# Altium PCB SmartToy_MainBoard_REV02 PCB.PcbDoc (part 3 of 3)
Units mm, origin at the board's own origin, x right, y up, seen from the top; angles counter-clockwise.
Board outline 55 x 50 mm, 2 copper layers (Top Layer, Bottom Layer), stack 0.98 mm thick; 120 components, 113 nets, 389 pads, 211 vias.
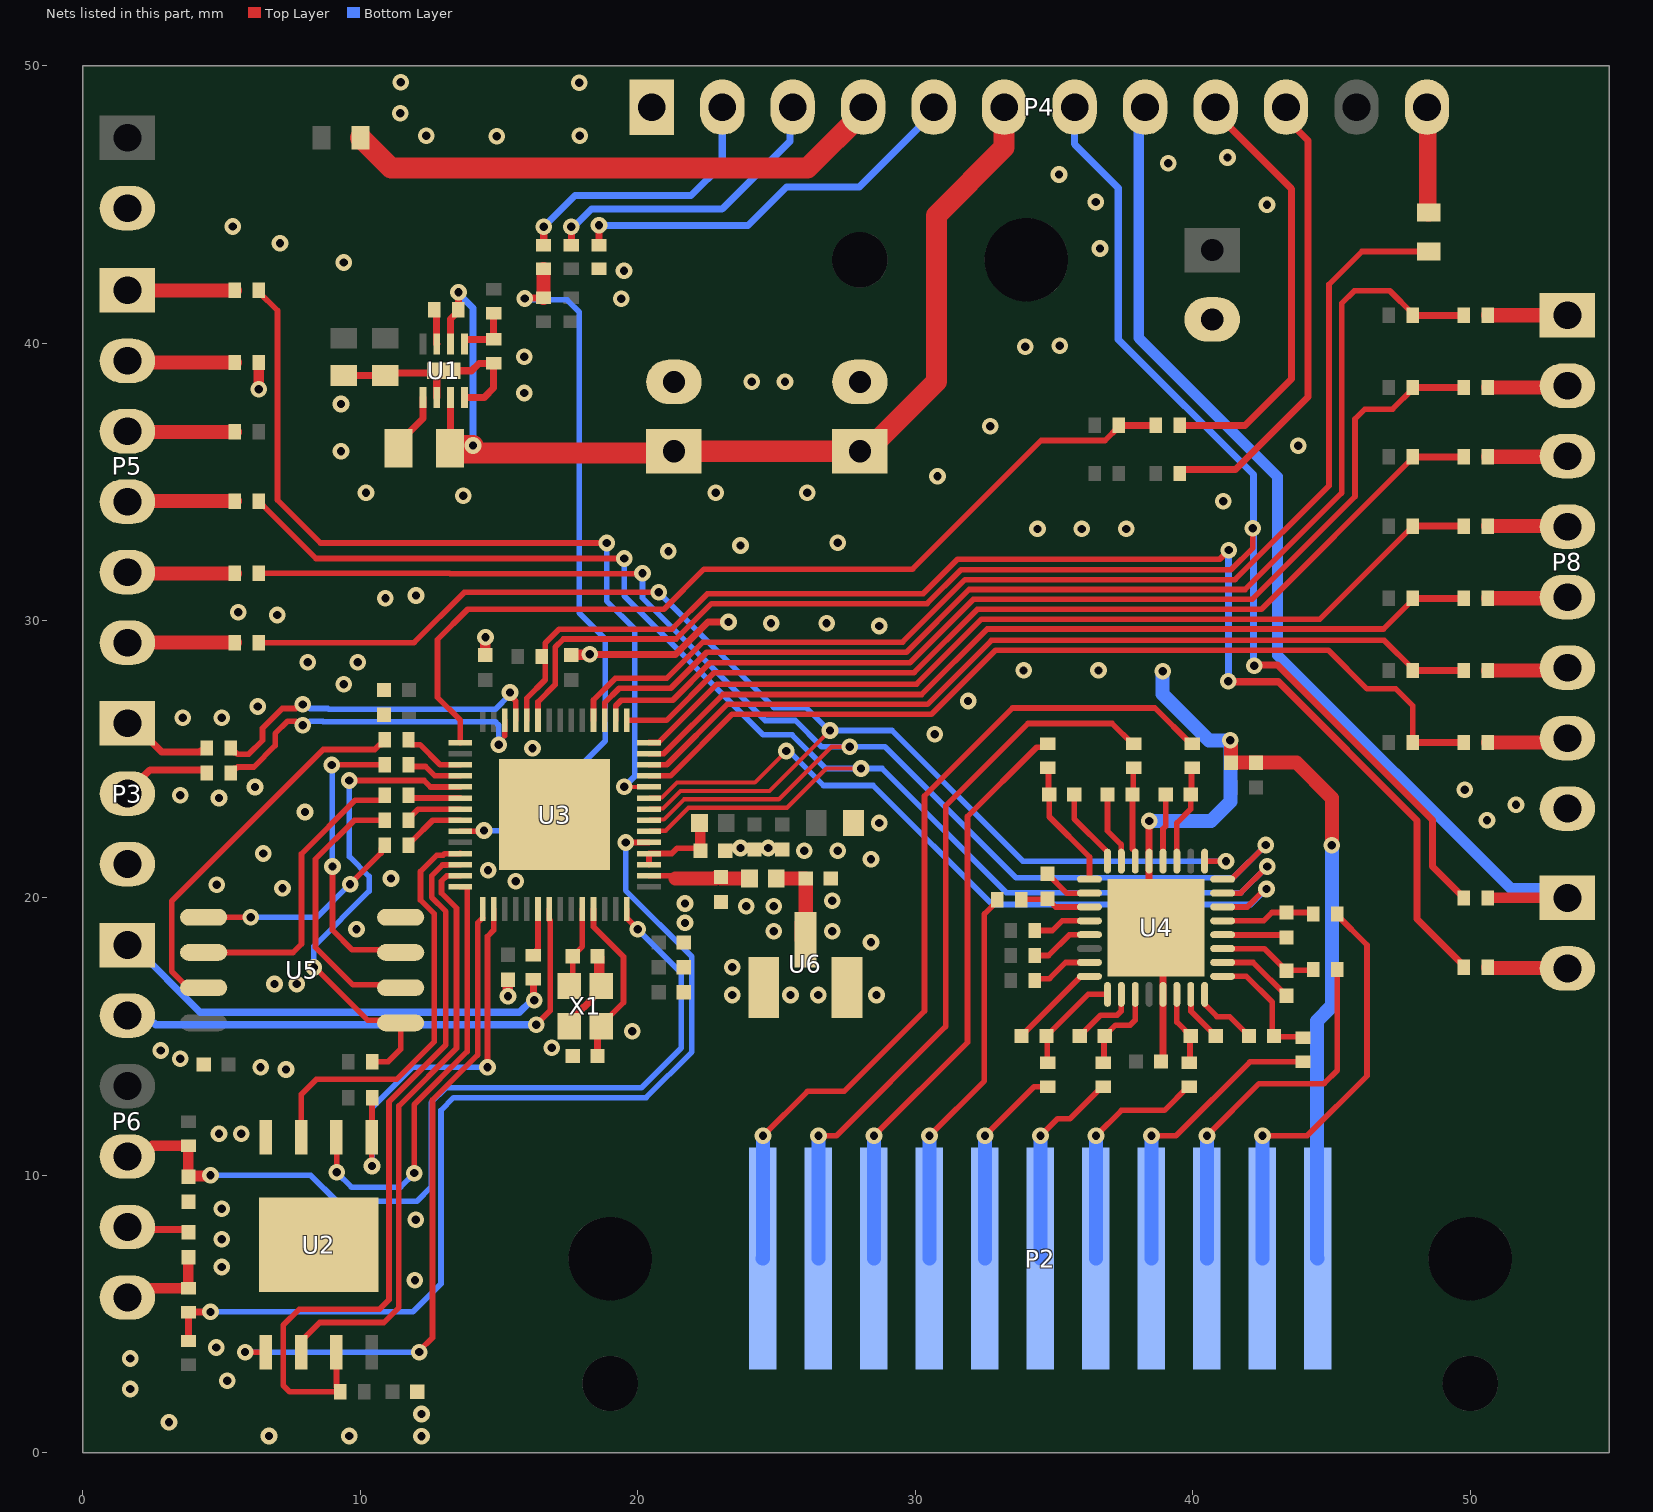
[diagram p2: the nets of this part, all layers, seen from the top]

## Via types
v1: diameter 0.6, hole 0.3, Top Layer to Bottom Layer, tented both sides, 211 vias

## Nets (pads, with @x,y where several pads share a name; then routed paths per layer and width w, separated by ;. In a path a pad name is that pad's centre, name@x,y a point inside that pad or via, vN(x,y) a via of type N, cw(c..) or ccw(c..) an arc to the next point about the centre after c; other vN are vias at no path point) (continued)
D_N: R16.1 U3.25 | length 12.6
  Top Layer w0.203: R16.1@5.332,25.4 5.332,25.35 5.455,25.227 5.526,25.227 5.574,25.179 5.97,25.179 6.469,25.678 6.469,26.115 7.181,26.827 7.67,26.827 7.817,26.975 v1(7.925,26.975) ; v1(15.392,27.407) 15.392,27.299 15.598,27.093 15.598,26.723 15.6,26.722 U3.25@15.6,26.4
  Bottom Layer w0.203: v1(7.925,26.975) 8.032,26.975 8.18,26.827 8.827,26.827 8.851,26.803 14.867,26.803 15.392,27.328 v1(15.392,27.407)
D_P: R17.1 U3.26 | length 12.1
  Top Layer w0.203: R17.1@5.332,24.5 5.332,24.55 5.455,24.673 5.526,24.673 5.574,24.721 6.159,24.721 6.927,25.489 6.927,25.926 7.371,26.37 7.67,26.37 7.817,26.222 v1(7.925,26.222) ; 15.198,25.847 15.198,26.398 U3.26@15.2,26.4
  Bottom Layer w0.203: v1(7.925,26.222) 8.032,26.222 8.18,26.37 8.637,26.37 8.662,26.345 14.867,26.345 14.986,26.226 v1(14.986,25.527)
ESP_EN: C21.2 P6.4 R25.1 U3.56 | length 31.6
  Top Layer w0.203: U3.56@19.6,19.6 19.6,19.278 19.99,18.888 v1(19.99,18.872)
  Top Layer w0.381: P6.4@1.6,10.68 2.13,10.68 2.518,11.068 R25.1@3.8,11.068 C21.2@3.8,9.95 3.829,9.979 4.569,9.979 v1(4.597,10.008)
  Bottom Layer w0.203: v1(4.597,10.008) 8.204,10.008 9.144,9.068 12.04,9.068 12.548,9.576 12.548,12.624 13.081,13.157 20.128,13.157 21.565,14.594 21.565,17.297 v1(19.99,18.872)
ESP_IO0: R26.1 R30.1 U3.5 | length 36.1
  Top Layer w0.203: v1(19.558,21.996) 19.56,21.998 20.398,21.998 U3.5@20.4,22
  Top Layer w0.254: R26.1@3.8,4.032 R30.1@3.8,5.068 3.831,5.1 3.857,5.074 4.592,5.074 v1(4.597,5.08)
  Bottom Layer w0.203: v1(4.597,5.08) 11.887,5.08 12.903,6.096 12.903,12.344 13.36,12.802 20.294,12.802 21.946,14.453 21.946,17.882 19.558,20.269 v1(19.558,21.996)
ESP_IO0_FL: C22.2 P6.6 R30.2 | length 3.5
  Top Layer w0.381: P6.6@1.6,5.6 2.13,5.6 2.462,5.932 R30.2@3.8,5.932 C22.2@3.8,7.05
ESP_RXD0: P6.2 U3.49 | length 19.3
  Top Layer w0.203: v1(16.332,15.43) 16.84,15.938 16.84,19.176 16.802,19.215 16.802,19.598 U3.49@16.8,19.6
  Bottom Layer w0.254: P6.2@1.6,15.76 1.858,15.502 2.55,15.502 2.622,15.43 v1(16.332,15.43)
ESP_TXD0: P6.1 R55.2 | length 16.5
  Top Layer w0.254: R55.2@16.231,17.069 16.245,17.054 16.245,16.322 v1(16.26,16.307)
  Bottom Layer w0.254: P6.1@1.6,18.3 1.8,18.3 4.22,15.88 15.738,15.88 16.129,16.27 v1@16.129,16.307
FL_HOLD: R4.1 U2.7 U3.40 | length 27.5
  Top Layer w0.203: U2.7@9.135,3.63 9.135,2.383 9.268,2.25 R4.1@9.268,2.2 7.452,2.2 7.214,2.438 7.214,4.597 7.798,5.182 10.693,5.182 11.028,5.517 11.028,12.654 13.081,14.707 13.081,19.51 12.565,20.026 12.565,20.795 12.959,21.188 13.128,21.188 13.138,21.198 13.598,21.198 U3.40@13.6,21.2
FL_WP: U2.3 U3.39 | length 15.2
  Top Layer w0.203: U2.3@7.865,11.37 7.865,12.92 8.407,13.462 11.303,13.462 12.654,14.813 12.654,19.434 12.167,19.922 12.167,20.955 12.756,21.544 12.98,21.544 13.035,21.598 13.598,21.598 U3.39@13.6,21.6
FUSE_OUT: F1.2 P4.4 | length 19.6
  Top Layer w0.762: F1.2@10,47.4 10.012,47.4 10.112,47.3 11.108,46.304 26.111,46.304 28.12,48.313 P4.4@28.12,48.5
GND: C1.2 C2.2 C3.1 C4.1 C5.1 C6.1 C8.1 C13.2 C14.2 C15.2 C21.1 C22.1 C23.2 C24.1 C25.1 C26.1 C27.1 C28.1 C29.1 C30.1 C31.1 C32.1 C33.1 C34.1 C35.1 C36.1 C37.1 C38.1 FB1.1 P1.2 P2.1 P3.3 P4.1 P6.5 P8.8 R5.1 R31.1 U1.2 U1.4 U1.9 U2.4 U2.9 U3.57 U4.5 U4.21 U4.33 U5.4 U6.2 X1.2 X1.4 | length 62
  Top Layer w0.254: P6.5@1.6,8.14 1.695,8.045 3.705,8.045 C22.1@3.8,7.95 ; C3.1@9.4,38.825 C4.1@10.9,38.825 10.987,38.913 12.708,38.913 12.75,38.871 U1.2@12.75,38.035 ; U1.9@13,39 14.004,39 14.272,39.268 R5.1@14.8,39.268 14.8,38.374 14.461,38.035 U1.4@13.75,38.035 ; X1.2@17.525,15.375 17.823,15.673 17.823,15.846 18.048,16.071 18.066,16.071 18.229,16.234 18.229,16.252 18.377,16.4 18.377,16.527 X1.4@18.675,16.825 ; v1(18.263,28.778) 21.361,28.778 22.53,29.947 v1(23.266,29.947) ; v1(38.425,22.773) U4.21@38.425,21.325 38.425,19.175 U4.33@38.675,18.925 38.925,18.675 U4.5@38.925,16.525 38.923,16.523 38.923,14.173 C15.2@38.85,14.1
  Top Layer w0.381: v1(6.332,38.332) FB1.1@6.332,39.3 ; C33.1@14.5,28.75 14.504,28.754 14.504,29.388 v1(14.507,29.392) ; v1(15.316,16.459) C35.1@15.316,17.051 ; C8.1@17.6,28.75 17.614,28.764 18.248,28.764 v1(18.263,28.778) ; C28.1@18.55,17.9 18.613,17.837 18.613,16.887 X1.4@18.675,16.825
  Top Layer w0.508: v1@41.338,25.693 v1(41.351,25.68) 41.374,25.657 41.374,24.876 C13.2@41.375,24.875 C14.2@42.275,24.875 43.73,24.875 45.009,23.597 v1(45.009,21.895)
  Bottom Layer w0.508: v1(38.425,22.773) 40.655,22.773 41.351,23.47 v1(41.351,25.68) 40.589,25.68 38.913,27.356 v1(38.913,28.169) ; P2.1@44.5,7 44.475,7.025 44.475,15.569 45.009,16.103 v1(45.009,21.895)
  other v1: 6.706,0.61 9.601,0.61 12.2,0.6 3.1,1.1 12.2,1.4 1.7,2.3 5.2,2.6 1.7,3.4 4.8,3.8 11.963,6.223 5,6.7 5,7.7 11.989,8.407 5,8.8 4.9,11.5 5.7,11.5 7.315,13.818 6.401,13.894 3.5,14.2 2.8,14.5 16.9,14.6 19.8,15.2 23.4,16.5 25.5,16.5 26.5,16.5 28.6,16.5 6.9,16.9 7.7,16.9 23.4,17.5 28.4,18.4 24.9,18.8 27,18.8 9.855,18.872 21.7,19.1 23.9,19.7 24.9,19.7 21.7,19.8 27,19.9 7.188,20.345 4.826,20.472 15.6,20.6 11.1,20.7 14.6,21 28.4,21.4 6.5,21.6 26,21.7 27.2,21.7 23.7,21.8 24.7,21.8 28.7,22.7 50.6,22.8 8,23.1 51.649,23.356 4.9,23.6 3.5,23.7 49.8,23.9 6.2,24 16.2,25.4 30.7,25.9 3.6,26.5 5,26.5 6.3,26.9 31.9,27.1 9.4,27.7 33.9,28.2 36.6,28.2 8.1,28.5 9.9,28.5 28.7,29.8 24.8,29.9 26.8,29.9 7,30.2 5.6,30.3 10.9,30.8 12,30.9 21.1,32.5 23.7,32.7 27.2,32.8 34.4,33.3 36,33.3 37.6,33.3 41.1,34.3 13.7,34.5 10.2,34.6 22.8,34.6 26.1,34.6 30.8,35.2 9.3,36.1 43.8,36.3 32.7,37 9.3,37.8 15.9,38.2 24.1,38.6 25.3,38.6 15.9,39.5 33.961,39.871 35.2,39.9 19.4,41.6 19.5,42.6 9.4,42.9 36.652,43.409 7.1,43.6 5.4,44.2 42.672,44.983 36.5,45.085 35.179,46.076 39.116,46.482 41.25,46.685 14.91,47.447 12.37,47.473 17.907,47.473 11.43,48.285 17.882,49.378 11.455,49.403
LANGUE_SEL: R35.1 R45.1 U3.29 | length 33.2
  Top Layer w0.203: U3.29@13.6,25.6 13.6,26.405 12.776,27.229 12.776,29.312 13.868,30.404 20.94,30.404 22.387,31.852 29.896,31.852 34.532,36.488 36.836,36.488 37.332,36.983 R45.1@37.332,37.033
  Top Layer w0.254: R45.1@37.332,37.033 R35.1@38.668,37.033
LED_K: R46.1 U3.18 | length 41.8
  Top Layer w0.203: U3.18@18.4,26.4 18.4,27.132 19.182,27.915 21.037,27.915 22.34,29.218 29.539,29.218 31.792,31.471 41.52,31.471 44.907,34.858 44.907,42.113 46.094,43.3 R46.1@48.5,43.3
LNA_IN: C26.2 L2.2 U3.2 | length 3.7
  Top Layer w0.203: U3.2@20.4,20.8 21.262,20.8 21.361,20.701
  Top Layer w0.508: 21.361,20.701 22.8,20.701 22.848,20.749 C26.2@23,20.749 ; C26.2@23,20.701 24.019,20.701 L2.2@24.02,20.7
MCU_DAC1: P4.7 R29.2 U3.23 | length 65.1
  Top Layer w0.203: U3.23@16.4,26.4 16.4,27.068 17.018,27.686 17.018,29.037 17.313,29.332 21.377,29.332 22.651,30.607 30.425,30.607 31.645,31.826 41.373,31.826 42.164,32.618 v1(42.164,33.325)
  Top Layer w0.254: v1(42.215,28.372) 42.24,28.397 43.053,28.397 48.641,22.809 48.641,21.127 R29.2@49.768,20
  Bottom Layer w0.203: v1(42.164,33.325) v1@42.189,33.299 ; v1@42.189,28.397 v1(42.215,28.372)
  Bottom Layer w0.254: P4.7@35.74,48.5 35.74,47.166 37.313,45.593 37.313,40.132 42.189,35.255 42.189,33.35 v1(42.164,33.325) ; v1@42.189,28.397 v1@42.189,33.299
MCU_DAC2: R33.2 R61.1 U3.24 | length 48.7
  Top Layer w0.203: U3.24@16,26.4 16,27.201 16.662,27.864 16.662,28.7 16.662,29.185 17.166,29.688 21.229,29.688 22.504,30.963 30.278,30.963 31.523,32.207 40.97,32.207 v1(41.3,32.537)
  Top Layer w0.254: v1(41.275,27.813) 41.296,27.792 43.083,27.792 48.082,22.793 48.082,19.236 49.768,17.55 R33.2@49.768,17.5
  Bottom Layer w0.203: v1@41.275,32.512 v1(41.3,32.537)
  Bottom Layer w0.254: v1(41.275,27.813) 41.288,27.826 41.288,32.499 v1@41.275,32.512
MCU_SL_PAGE2: R37.1 R47.1 U3.17 | length 42.1
  Top Layer w0.203: U3.17@18.8,26.4 18.8,27.03 19.329,27.559 21.184,27.559 22.482,28.857 29.682,28.857 31.939,31.115 41.885,31.115 45.364,34.595 45.364,41.427 45.822,41.885 47.097,41.885 47.932,41.05 R37.1@47.932,41
  Top Layer w0.254: R37.1@47.932,41 R47.1@49.768,41
MCU_SL_PAGE3: R38.1 R48.1 U3.16 | length 37.5
  Top Layer w0.203: U3.16@19.2,26.4 19.202,26.402 19.202,26.928 19.4,27.127 21.255,27.127 22.604,28.476 29.804,28.476 32.087,30.759 42.139,30.759 45.846,34.467 45.846,37.261 46.203,37.617 47.199,37.617 47.932,38.35 R38.1@47.932,38.4
  Top Layer w0.254: R38.1@47.932,38.4 R48.1@49.768,38.4
MCU_SL_PAGE4: R39.1 R49.1 U3.15 | length 34.1
  Top Layer w0.203: U3.15@19.6,26.4 21.031,26.4 22.751,28.121 29.951,28.121 32.234,30.404 42.469,30.404 47.792,35.727 47.808,35.727 47.932,35.85 R39.1@47.932,35.9
  Top Layer w0.254: R39.1@47.932,35.9 R49.1@49.768,35.9
MCU_SL_PAGE5: R40.1 R50.1 U3.14 | length 32.6
  Top Layer w0.203: U3.14@20.4,25.6 20.749,25.6 22.854,27.706 30.045,27.706 32.387,30.048 44.58,30.048 R40.1@47.932,33.4
  Top Layer w0.254: R40.1@47.932,33.4 R50.1@49.768,33.4
MCU_SL_PAGE6: R41.1 R51.1 U3.13 | length 31.7
  Top Layer w0.203: U3.13@20.4,25.2 20.933,25.2 23.063,27.33 30.227,27.33 32.589,29.693 46.874,29.693 47.932,30.75 R41.1@47.932,30.8
  Top Layer w0.254: R41.1@47.932,30.8 R51.1@49.768,30.8
MCU_SL_PAGE7: R42.1 R52.1 U3.12 | length 31.7
  Top Layer w0.203: U3.12@20.4,24.8 21.041,24.8 23.216,26.975 30.434,26.975 32.741,29.281 46.9,29.281 47.932,28.25 R42.1@47.932,28.2
  Top Layer w0.254: R42.1@47.932,28.2 R52.1@49.768,28.2
MCU_SL_PAGE8: R43.1 R53.1 U3.11 | length 33.4
  Top Layer w0.203: U3.11@20.4,24.4 21.174,24.4 23.393,26.619 30.582,26.619 32.888,28.926 44.891,28.926 46.281,27.536 47.318,27.536 47.932,26.922 R43.1@47.932,25.6
  Top Layer w0.254: R43.1@47.932,25.6 R53.1@49.768,25.6
MUSIC_MODE: R21.1 R24.1 U3.37 | length 26.3
  Top Layer w0.203: U3.37@13.6,22.4 13.602,22.402 14.426,22.402 v1(14.453,22.428)
  Top Layer w0.254: v1(15.926,41.605) 15.939,41.618 16.587,41.618 R21.1@16.6,41.632
  Top Layer w0.508: R21.1@16.6,41.632 R24.1@16.6,42.668
  Bottom Layer w0.203: v1(14.453,22.428) 15.596,22.428 18.821,25.654 18.821,29.337 17.884,30.274 17.884,41.12 17.45,41.554 15.977,41.554 v1(15.926,41.605)
NetC7_1: C7.1 R8.2 U4.1 | length 3.8
  Top Layer w0.203: R8.2@34.775,14.057 34.75,14.082 34.75,15 C7.1@34.725,15.025 36.225,16.525 U4.1@36.925,16.525
NetC7_2: C7.2 U4.32 | length 3.3
  Top Layer w0.203: C7.2@33.825,15.025 33.978,15.178 33.978,15.182 35.941,17.145 35.941,17.153 35.963,17.175 U4.32@36.275,17.175
NetC9_1: C9.1 R9.2 U4.3 | length 3.3
  Top Layer w0.203: R9.2@36.775,14.057 36.8,14.082 36.8,15 C9.1@36.825,15.025 37.218,15.418 37.744,15.418 37.925,15.598 U4.3@37.925,16.525
NetC9_2: C9.2 U4.2 | length 2.5
  Top Layer w0.203: C9.2@35.925,15.025 36.673,15.773 37.272,15.773 37.416,15.918 37.416,16.516 U4.2@37.425,16.525
NetC10_1: C10.1 R10.2 U4.6 | length 2.7
  Top Layer w0.203: U4.6@39.425,16.525 39.425,15.525 C10.1@39.925,15.025 39.9,15 39.9,14.082 R10.2@39.875,14.057
NetC10_2: C10.2 U4.7 | length 1.9
  Top Layer w0.203: U4.7@39.925,16.525 39.934,16.516 39.934,15.916 C10.2@40.825,15.025
NetC11_1: C11.1 R11.2 U4.9 | length 4.5
  Top Layer w0.203: U4.9@41.075,17.175 41.931,17.175 42.866,16.24 42.866,15.084 C11.1@42.925,15.025 42.959,14.991 43.941,14.991 R11.2@43.975,14.957
NetC11_2: C11.2 U4.8 | length 2.4
  Top Layer w0.203: U4.8@40.425,16.525 40.434,16.516 40.434,16.157 40.869,15.723 41.327,15.723 C11.2@42.025,15.025
NetC12_1: C12.1 R12.2 U4.11 | length 3.6
  Top Layer w0.203: U4.11@41.075,18.175 42.575,18.175 C12.1@43.375,17.375 43.4,17.4 44.318,17.4 R12.2@44.343,17.425
NetC12_2: C12.2 U4.10 | length 2.8
  Top Layer w0.203: U4.10@41.075,17.675 42.175,17.675 C12.2@43.375,16.475
NetC16_1: C16.1 R13.2 U4.13 | length 3.4
  Top Layer w0.203: U4.13@41.075,19.175 42.553,19.175 42.853,19.475 C16.1@43.375,19.475 44.293,19.475 R13.2@44.343,19.425
NetC16_2: C16.2 U4.12 | length 2.3
  Top Layer w0.203: U4.12@41.075,18.675 41.084,18.666 43.284,18.666 C16.2@43.375,18.575
NetC17_1: C17.1 R14.2 U4.19 | length 3.6
  Top Layer w0.203: U4.19@39.425,21.325 39.425,22.702 39.925,23.202 C17.1@39.925,23.725 39.95,23.75 39.95,24.668 R14.2@39.975,24.693
NetC17_2: C17.2 U4.20 | length 2.4
  Top Layer w0.203: U4.20@38.925,21.325 38.925,22.49 39.025,22.59 C17.2@39.025,23.725
NetC18_1: C18.1 R15.2 U4.22 | length 3.4
  Top Layer w0.203: R15.2@37.875,24.693 37.85,24.668 37.85,23.75 C18.1@37.825,23.725 37.825,21.763 37.925,21.663 U4.22@37.925,21.325
NetC18_2: C18.2 U4.23 | length 2.6
  Top Layer w0.203: C18.2@36.925,23.725 36.925,22.419 37.416,21.928 37.416,21.334 U4.23@37.425,21.325
NetC19_1: C19.1 R18.2 U4.25 | length 4.6
  Top Layer w0.203: R18.2@34.775,24.693 34.8,24.668 34.8,23.75 C19.1@34.825,23.725 34.825,22.925 36.275,21.475 U4.25@36.275,20.675
NetC19_2: C19.2 U4.24 | length 2.9
  Top Layer w0.203: C19.2@35.725,23.725 35.725,22.85 36.925,21.65 U4.24@36.925,21.325
NetC20_1: C20.1 R19.2 U4.27 | length 2.6
  Top Layer w0.203: R19.2@33.817,19.939 33.834,19.955 34.741,19.955 C20.1@34.757,19.971 35.053,19.675 U4.27@36.275,19.675
NetC20_2: C20.2 U4.26 | length 1.8
  Top Layer w0.203: C20.2@34.757,20.871 35.453,20.175 U4.26@36.275,20.175
NetC25_2: C25.2 L2.1 U6.1 | length 3.3
  Top Layer w0.508: L2.1@24.98,20.7 C25.2@26.05,20.7 26.05,19.25 25.9,19.1 U6.1@25.9,18.5
NetFB1_2: FB1.2 P5.2 | length 3.9
  Top Layer w0.508: P5.2@1.6,39.3 FB1.2@5.468,39.3
NetFB2_2: FB2.2 P5.3 | length 3.9
  Top Layer w0.508: P5.3@1.6,36.8 FB2.2@5.468,36.8
NetL1_2: L1.2 U1.1 | length 2.2
  Top Layer w0.254: L1.2@11.37,36.2 11.37,36.395 12.25,37.275 U1.1@12.25,38.035
NetP4_2: P4.2 R24.2 | length 10.1
  Top Layer w0.254: R24.2@16.6,43.532 16.612,43.543 16.606,43.549 16.606,44.19 v1(16.612,44.196)
  Bottom Layer w0.254: v1(16.612,44.196) 17.729,45.314 21.92,45.314 23.04,46.433 P4.2@23.04,48.5
NetP4_3: P4.3 R27.2 | length 11.1
  Top Layer w0.254: R27.2@17.6,43.532 v1(17.6,44.194)
  Bottom Layer w0.254: v1(17.6,44.194) 17.692,44.194 18.329,44.831 23.038,44.831 25.475,47.268 25.475,48.395 P4.3@25.58,48.5
NetP4_5: P4.5 R31.2 | length 14.6
  Top Layer w0.254: R31.2@18.6,43.532 v1(18.6,44.24)
  Bottom Layer w0.254: v1(18.6,44.24) 23.97,44.24 25.349,45.618 27.978,45.618 30.66,48.3 P4.5@30.66,48.5
NetP4_9: P4.9 R35.2 | length 15.6
  Top Layer w0.254: R35.2@39.532,37.033 41.885,37.033 43.561,38.71 43.561,45.559 40.82,48.3 P4.9@40.82,48.5
NetP4_10: P4.10 R36.2 | length 16.6
  Top Layer w0.254: R36.2@39.532,35.3 39.532,35.35 39.63,35.448 41.544,35.448 44.145,38.049 44.145,47.3 43.36,48.086 P4.10@43.36,48.5
NetP4_12: P4.12 R46.2 | length 3.8
  Top Layer w0.635: P4.12@48.44,48.5 48.47,48.47 48.47,44.708 48.478,44.7 R46.2@48.5,44.7
NetP5_1: P5.1 R23.2 | length 3.9
  Top Layer w0.508: P5.1@1.6,41.9 R23.2@5.468,41.9
NetP5_4: P5.4 R28.2 | length 3.9
  Top Layer w0.508: P5.4@1.6,34.3 R28.2@5.468,34.3
NetP5_5: P5.5 R32.2 | length 3.9
  Top Layer w0.508: P5.5@1.6,31.7 R32.2@5.468,31.7
NetP5_6: P5.6 R34.2 | length 3.9
  Top Layer w0.508: P5.6@1.6,29.2 R34.2@5.468,29.2
NetR2_2: R2.2 U1.7 | length 1.3
  Top Layer w0.254: R2.2@12.668,41.2 12.748,41.12 12.748,39.967 U1.7@12.75,39.965
NetR3_1: R3.1 R5.2 U1.5 | length 2.2
  Top Layer w0.254: U1.5@13.75,39.965 13.75,40.13 13.752,40.132 R5.2@14.8,40.132 R3.1@14.8,41.068
NetR6_2: R6.2 U4.28 | length 2.1
  Top Layer w0.203: R6.2@34.307,18.825 34.939,18.825 35.289,19.175 U4.28@36.275,19.175
NetR7_2: R7.2 U4.29 | length 2.3
  Top Layer w0.203: R7.2@34.307,17.925 34.801,17.925 35.551,18.675 U4.29@36.275,18.675
NetR20_1: R20.1 U4.31 | length 2.2
  Top Layer w0.203: R20.1@34.307,17.025 34.376,17.094 34.837,17.094 35.418,17.675 U4.31@36.275,17.675
NetR55_1: R55.1 U3.48 | length 1.8
  Top Layer w0.203: R55.1@16.1,17.932 16.15,17.932 16.4,18.182 U3.48@16.4,19.6
NetR56_1: R56.1 U3.36 | length 2.3
  Top Layer w0.203: R56.1@11.732,21.9 11.732,21.95 11.855,22.073 11.88,22.073 12.607,22.8 U3.36@13.6,22.8
NetR57_1: R57.1 U3.35 | length 2.1
  Top Layer w0.203: R57.1@11.732,22.8 11.732,22.85 12.082,23.2 U3.35@13.6,23.2
NetR58_1: R58.1 U3.34 | length 1.9
  Top Layer w0.203: R58.1@11.732,23.7 11.83,23.602 13.598,23.602 U3.34@13.6,23.6
NetR59_1: R59.1 U3.32 | length 2
  Top Layer w0.203: R59.1@11.732,24.8 11.792,24.74 12.344,24.74 12.684,24.4 U3.32@13.6,24.4
NetR60_1: R60.1 U3.31 | length 2.3
  Top Layer w0.203: R60.1@11.732,25.7 11.732,25.65 11.855,25.527 12.143,25.527 12.869,24.8 U3.31@13.6,24.8
PWR_IN: C1.1 C2.1 L1.1 P4.6 R2.1 U1.3 U1.6 | length 39.9
  Top Layer w0.254: L1.1@13.23,36.2 13.25,36.22 U1.3@13.25,38.035 ; U1.6@13.25,39.965 13.25,40.868 13.532,41.15 R2.1@13.532,41.2 v1(13.532,41.834)
  Top Layer w0.762: L1.1@13.23,36.2 L1.1@13.29,36.14 ; L1.1@13.25,36.22 13.337,36.307 v1(14.055,36.307) ; L1.1@13.337,36.04 21.24,36.04 C1.1@21.3,36.1 C2.1@28,36.1 28.419,36.519 28.67,36.519 30.759,38.608 30.759,44.602 33.2,47.043 P4.6@33.2,48.5
  Bottom Layer w0.254: v1(13.532,41.834) 13.532,41.784 14.055,41.261 v1(14.055,36.307)
SELECT_PAGE2: P8.1 R47.2 | length 2.9
  Top Layer w0.508: R47.2@50.632,41 P8.1@53.5,41
SELECT_PAGE3: P8.2 R48.2 | length 2.9
  Top Layer w0.508: R48.2@50.632,38.4 P8.2@53.5,38.4
SELECT_PAGE4: P8.3 R49.2 | length 2.9
  Top Layer w0.508: R49.2@50.632,35.9 P8.3@53.5,35.9
SELECT_PAGE5: P8.4 R50.2 | length 2.9
  Top Layer w0.508: R50.2@50.632,33.4 P8.4@53.5,33.4
SELECT_PAGE6: P8.5 R51.2 | length 2.9
  Top Layer w0.508: R51.2@50.632,30.8 P8.5@53.5,30.8
SELECT_PAGE7: P8.6 R52.2 | length 2.9
  Top Layer w0.508: R52.2@50.632,28.2 P8.6@53.5,28.2
SELECT_PAGE8: P8.7 R53.2 | length 2.9
  Top Layer w0.508: R53.2@50.632,25.6 P8.7@53.5,25.6
SPI2_CLK: U2.6 U3.41 | length 21.6
  Top Layer w0.203: U2.6@7.865,3.63 7.865,4.03 8.534,4.699 10.846,4.699 11.384,5.237 11.384,12.507 13.462,14.585 13.462,19.634 12.921,20.175 12.921,20.605 13.114,20.798 13.598,20.798 U3.41@13.6,20.8
SPI2_CS: R1.1 U2.1 U3.44 | length 15.1
  Top Layer w0.203: v1(10.414,10.338) 10.41,10.342 10.41,11.365 U2.1@10.405,11.37 10.418,11.383 10.418,12.787 R1.1@10.432,12.8 ; v1(14.58,13.894) 14.58,18.614 14.8,18.835 U3.44@14.8,19.6
  Bottom Layer w0.203: v1(10.414,10.338) 10.414,12.44 11.868,13.894 v1(14.58,13.894)
SPI2_MISO: U2.2 U3.42 | length 15.8
  Top Layer w0.203: U2.2@9.135,11.37 9.14,11.365 9.14,10.114 v1(9.144,10.109) ; v1(11.938,10.084) 11.938,12.558 13.843,14.463 13.843,20.398 13.841,20.4 U3.42@13.6,20.4
  Bottom Layer w0.203: v1(9.144,10.109) 9.677,9.576 11.447,9.576 11.938,10.067 v1(11.938,10.084)
SPI2_MOSI: U2.5 U3.43 | length 23.6
  Top Layer w0.203: v1(5.842,3.632) 6.593,3.632 U2.5@6.595,3.63 ; v1(12.116,3.632) 12.116,3.666 12.598,4.149 12.598,12.715 14.224,14.341 14.224,19.102 U3.43@14.398,19.277
  Bottom Layer w0.203: v1(5.842,3.632) v1(12.116,3.632)
SPI3_MISO: R28.1 U3.6 U4.15 | length 54
  Top Layer w0.152: U3.6@20.4,22.4 20.424,22.424 21.001,22.424 21.825,23.249 25.371,23.249 26.786,24.663 v1(28.042,24.663)
  Top Layer w0.203: R28.1@6.332,34.3 6.332,34.25 6.455,34.127 6.505,34.127 8.399,32.233 v1(19.507,32.233) ; U4.15@41.075,20.175 41.724,20.175 v1(42.682,21.132)
  Bottom Layer w0.203: v1(19.507,32.233) 19.507,30.889 24.517,25.879 25.556,25.879 26.772,24.663 v1(28.042,24.663) 28.804,24.663 33.274,20.193 41.742,20.193 v1(42.682,21.132)
SPI3_MOSI: R32.1 U3.7 U4.16 | length 52.3
  Top Layer w0.152: U3.7@20.4,22.8 20.424,22.824 20.934,22.824 21.664,23.553 25.077,23.553 26.975,25.451 v1(27.635,25.451)
  Top Layer w0.203: R32.1@6.333,31.699 13.209,31.699 13.23,31.679 20.147,31.679 v1(20.168,31.699) ; U4.16@41.075,20.675 41.4,20.675 v1(42.631,21.906)
  Bottom Layer w0.203: v1(20.168,31.699) 20.168,30.814 24.588,26.394 25.676,26.394 26.619,25.451 v1(27.635,25.451) 28.905,25.451 33.63,20.726 41.451,20.726 v1(42.631,21.906)
SPI3_SCK: R34.1 U3.8 U4.17 | length 48.1
  Top Layer w0.152: U3.8@20.4,23.2 20.424,23.224 20.903,23.224 21.538,23.858 24.747,23.858 26.47,25.581 v1(26.924,26.035)
  Top Layer w0.203: R34.1@6.332,29.2 11.928,29.2 13.741,31.013 v1(20.752,31.013) ; U4.17@40.425,21.325 v1(41.198,21.325)
  Bottom Layer w0.203: v1@20.753,31.013 24.905,26.861 26.06,26.861 26.886,26.035 29.159,26.035 33.869,21.325 v1(41.198,21.325)
SPICLK: R58.2 U5.6 | length 10.8
  Top Layer w0.203: U5.6@4.35,18.035 7.57,18.035 7.874,18.339 7.874,21.59 9.811,23.527 10.745,23.527 10.868,23.65 R58.2@10.868,23.7
SPICS0: R54.1 U3.33 U5.1 | length 17.4
  Top Layer w0.203: v1(8.323,17.493) 8.363,17.493 10.26,15.595 10.725,15.595 U5.1@10.77,15.55 ; v1(9.601,24.232) 12.294,24.232 12.525,24 U3.33@13.6,24 ; R54.1@10.432,14.1 11.001,14.1 11.45,14.549 U5.1@11.45,15.495
  Bottom Layer w0.203: v1(8.323,17.493) 8.323,18.255 10.312,20.244 10.312,20.777 9.601,21.488 v1(9.601,24.232)
SPID: R56.2 U5.5 | length 7.7
  Top Layer w0.203: U5.5@4.35,19.305 v1(6.045,19.304) ; v1(9.627,20.498) 10.745,21.616 10.745,21.777 R56.2@10.868,21.9
  Bottom Layer w0.203: v1(6.045,19.304) 8.433,19.304 v1(9.627,20.498)
SPIHD: R60.2 U5.7 | length 14.1
  Top Layer w0.203: U5.7@4.45,16.865 3.684,16.865 3.2,17.348 3.2,19.888 8.661,25.349 10.517,25.349 10.695,25.527 10.745,25.527 10.868,25.65 R60.2@10.868,25.7
SPIQ: R57.2 U5.2 | length 9.2
  Top Layer w0.203: U5.2@10.725,16.865 9.734,16.865 8.382,18.217 8.382,21.4 9.782,22.8 R57.2@10.868,22.8
SPIWP: R59.2 U5.3 | length 9.9
  Top Layer w0.203: v1(8.966,24.79) 8.971,24.795 10.863,24.795 R59.2@10.868,24.8 ; v1(8.992,21.133) 8.992,18.839 9.695,18.135 U5.3@10.725,18.135
  Bottom Layer w0.203: v1(8.966,24.79) 8.979,24.778 8.979,21.145 v1(8.992,21.133)
SPK1: P4.8 P7.1 R29.1 | length 38.9
  Top Layer w0.381: R29.1@50.632,20 P7.1@53.5,20
  Bottom Layer w0.381: P4.8@38.28,48.5 38.049,48.269 38.049,40.183 43.053,35.179 43.053,28.753 51.466,20.34 53.16,20.34 P7.1@53.5,20
SPK2: P7.2 R33.1 | length 2.9
  Top Layer w0.508: R33.1@50.632,17.5 50.652,17.48 53.48,17.48 P7.2@53.5,17.46
TOUCH_CH0: P2.7 R8.1 | length 7.4
  Top Layer w0.203: v1(32.511,11.43) 34.274,13.193 R8.1@34.775,13.193
  Bottom Layer w0.508: P2.7@32.506,7.006 v1@32.506,11.425
TOUCH_CH1: P2.6 R9.1 | length 7.4
  Top Layer w0.203: v1(34.511,11.43) 35.121,12.04 35.571,12.04 36.725,13.193 R9.1@36.775,13.193
  Bottom Layer w0.508: P2.6@34.506,7.006 v1@34.506,11.425
TOUCH_CH2: P2.5 R10.1 | length 8.5
  Top Layer w0.203: v1(36.511,11.43) 37.425,12.344 38.976,12.344 39.825,13.193 R10.1@39.875,13.193
  Bottom Layer w0.508: P2.5@36.505,7.006 v1@36.505,11.425
TOUCH_CH3: P2.4 R11.1 | length 11
  Top Layer w0.203: v1(38.511,11.43) 39.395,11.43 42.059,14.093 R11.1@43.975,14.093
  Bottom Layer w0.508: P2.4@38.506,7.006 v1@38.506,11.425
TOUCH_CH4: P2.3 R12.1 | length 13.7
  Top Layer w0.203: v1(40.511,11.43) 42.391,13.31 44.729,13.31 45.207,13.787 R12.1@45.207,17.425
  Bottom Layer w0.508: P2.3@40.505,7.006 v1@40.505,11.425
TOUCH_CH5: P2.2 R13.1 | length 15.4
  Top Layer w0.203: v1(42.511,11.43) 44.12,11.43 46.279,13.589 46.279,18.303 45.207,19.375 R13.1@45.207,19.425
  Bottom Layer w0.508: P2.2@42.506,7.006 v1@42.506,11.425
TOUCH_CH6: P2.11 R14.1 | length 31.4
  Top Layer w0.203: v1(24.511,11.43) 26.111,13.03 27.432,13.03 30.328,15.926 30.328,23.673 33.503,26.848 38.634,26.848 39.925,25.557 R14.1@39.975,25.557
  Bottom Layer w0.508: P2.11@24.5,7 24.506,7.006 24.506,11.425 v1(24.511,11.43)
TOUCH_CH7: P2.10 R15.1 | length 26.9
  Top Layer w0.203: v1(26.511,11.43) 27.153,11.43 31.09,15.367 31.09,23.317 34.061,26.289 37.093,26.289 37.825,25.557 R15.1@37.875,25.557
  Bottom Layer w0.508: P2.10@26.505,7.006 v1@26.505,11.425
TOUCH_CH8: P2.9 R18.1 | length 21.3
  Top Layer w0.203: v1(28.511,11.43) 31.877,14.796 31.877,22.936 34.374,25.433 34.652,25.433 R18.1@34.775,25.557
  Bottom Layer w0.508: P2.9@28.506,7.006 v1@28.506,11.425
TOUCH_CH9: P2.8 R19.1 | length 13.9
  Top Layer w0.203: v1(30.511,11.43) 32.487,13.406 32.487,19.422 32.954,19.889 R19.1@32.954,19.939
  Bottom Layer w0.508: P2.8@30.506,7.006 v1@30.506,11.425
TOUCH_SS1: U3.9 U4.14 | length 27.3
  Top Layer w0.152: U3.9@20.4,23.6 20.424,23.624 20.872,23.624 21.411,24.163 24.214,24.163 v1(25.349,25.298)
  Top Layer w0.203: U4.14@41.075,19.675 41.961,19.675 42.608,20.322 v1(42.654,20.322)
  Bottom Layer w0.203: v1(25.349,25.298) 25.447,25.298 26.691,24.054 28.477,24.054 32.77,19.761 42.094,19.761 v1(42.654,20.322)
TOUCH_SS2: R23.1 U3.10 | length 30.6
  Top Layer w0.152: v1(19.507,24.003) 19.509,24.001 20.398,24.001 U3.10@20.4,24
  Top Layer w0.203: R23.1@6.332,41.9 6.332,41.85 7.009,41.172 7.009,34.342 8.56,32.791 v1(18.872,32.791)
  Bottom Layer w0.203: v1(18.872,32.791) 18.872,30.709 19.888,29.693 19.888,24.384 v1(19.507,24.003)
USB_D_N: P3.1 R16.2 | length 3.4
  Top Layer w0.254: P3.1@1.6,26.3 1.8,26.3 2.832,25.267 4.217,25.267 4.265,25.315 4.434,25.315 4.468,25.35 R16.2@4.468,25.4
USB_D_P: P3.2 R17.2 | length 3.3
  Top Layer w0.254: P3.2@1.6,23.76 1.6,23.805 2.407,24.613 4.37,24.613 4.468,24.515 R17.2@4.468,24.5
VDD3P3: C38.2 L3.2 U3.3 U3.4 | length 3.3
  Top Layer w0.203: U3.3@20.4,21.2 U3.4@20.4,21.6 21.219,21.6 21.412,21.793 C38.2@22.243,21.793
  Top Layer w0.381: L3.2@22.22,22.7 22.25,22.67 C38.2@22.25,21.7
XTAL_N: C28.2 U3.52 X1.1 | length 3
  Top Layer w0.203: X1.1@17.525,16.825 17.65,16.95 C28.2@17.65,17.9 18,18.25 U3.52@18,19.6
XTAL_P: C27.2 U3.53 X1.3 | length 6.1
  Top Layer w0.203: U3.53@18.4,19.6 18.4,18.963 19.482,17.882 19.482,16.232 X1.3@18.675,15.425
  Top Layer w0.254: C27.2@18.55,14.3 18.55,15.3 X1.3@18.675,15.425
pads on no net: U3.19 U3.21 U3.22 U3.46 U3.47 U3.50 U3.51 U3.55 U4.30

## Polygon pours and split planes (outlines as drawn)
GND on Top Layer "GND" (solid, remove dead copper, pour order 8): 0,0 0,50 55,50 55,0
NetL1_2 on Top Layer "+5V_IN_L10_P-001" (solid, remove dead copper, pour order 6): 12.378,38.416 12.378,37.095 11.997,36.714 11.997,35.469 11.87,35.342 10.778,35.342 10.6,35.52 10.6,37.019 11.997,38.416
+3.3V on Top Layer "+5V_IN_L10_P-001" (solid, remove dead copper, pour order 5): 8.594,39.569 7.599,39.569 7.442,39.726 7.442,41.173 7.656,41.387 11.388,41.387 12.378,40.397 12.378,39.584 12.333,39.569
PWR_IN on Top Layer "+5V_IN_L10_P-001" (solid, remove dead copper, pour order 2): 12.954,35.204 12.7,35.458 12.7,36.855 13.132,37.287 13.132,38.405 13.386,38.405 13.386,37.287 13.564,37.109 28.626,37.109 30.175,38.659 30.175,44.983 32.309,47.117 32.309,49.276 32.639,49.606 33.833,49.606 34.087,49.352 34.087,46.33 31.928,44.171 31.928,37.465 29.667,35.204
FUSE_OUT on Top Layer "+5V_IN_L10_P-001" (solid, remove dead copper, pour order 1): 9.576,46.711 10.871,45.415 26.873,45.415 29.032,47.574 29.032,49.2 28.626,49.606 27.584,49.606 27.254,49.276 27.254,48.133 25.959,46.838 12.116,46.838 10.886,48.067 9.764,48.067 9.576,47.879
BAT_IN on Top Layer "+5V_IN_L10_P-001" (solid, remove dead copper, pour order 0): 0.61,46.507 8.738,46.507 9.017,46.787 9.017,48.158 8.56,48.616 0.61,48.616 0.406,48.412 0.406,46.711
GND on Bottom Layer "GND" (solid, remove dead copper, pour order 7): 0,0 0,50 55,50 55,0

## Keep-outs
Keep-Out Layer:
  the board outline again, w0.127

## Other copper
Top Layer:
  pour cut-out: 6.709,37.227 7.442,37.227 7.442,36.957 6.709,36.957
  pour cut-out: 5.846,39.727 5.846,37.227 5.573,37.227 5.573,41.473 5.851,41.473 5.851,39.459
  pour cut-out: 49.077,42.823 49.077,41.427 48.819,41.427 48.819,42.823
  pour cut-out: 49.077,44.223 49.077,43.777 47.923,43.777 47.923,44.223
  pour cut-out: 11.003,48.184 11.003,50.165 10.795,50.165 10.795,48.184
  pour cut-out: 47,12.5 55,12.5 55,0 13,0 13,12.5 25,12.5 26,13.5 27,13.5 29.5,16 29.5,24 33,27.5 42.91,27.5 47,23.41
Bottom Layer:
  pour cut-out: 13,0 13,12.5 25,12.5 26,13.5 27,13.5 29.5,16 29.5,24 33,27.5 43,27.5 47,23.5 47,12.5 55,12.5 55,0

## Silkscreen, mask and mechanical layers (free items; w line width, h text height)
Top Overlay:
  text "B+" at 3.5,47 h1.27
  text "MENU CONNECTOR" at 21.3,46 h1.14
  text "B-" at 3.5,44.5 h1.27
  text "FIRST PAGE CONNECTOR" at 4.3,28.4 h1.14 r90
  text "USB" at 3.4,22.5 h1.14
  text "PAGE  /  / SELECTION" at 46,21.9 h1.14
  text "SPEAKER" at 49.4,14.6 h1.14
  text "DEBUG" at 2.692,0.457 h1.14 r90
Bottom Overlay:
  text "DM" at 5.188,26 h1.27
  text "DP" at 5.188,23.5 h1.27
  text "GND" at 6,21 h1.27
  text "TXD0" at 6.532,18 h1.27
  text "RXD0" at 6.6,15.4 h1.27
  text "3V3" at 5.641,12.8 h1.27
  text "EN" at 5.116,10.221 h1.27
  text "GND" at 6.124,7.61 h1.27
  text "IO0" at 5.409,5 h1.27
Mechanical 1:
  the board outline again, w0.127

## Dimensions
28,43 to 0,50 on Mechanical 1
34,43 to 55,50 on Mechanical 1
50,2.5 to 55,0 on Mechanical 1
28,43 to 34,43 on Mechanical 1
0,50 to 55,50 on Mechanical 1
19,2.5 to 50,2.5 on Mechanical 1
0,50 to 0,0 on Mechanical 1
19,7 to 19,2.5 on Mechanical 1